# Altium PCB robot.pcbdoc (part 2 of 2)
Units mm, origin at the board's own origin, x right, y up, seen from the top; angles counter-clockwise.
Board outline 179.4 x 108.65 mm, 2 copper layers (Top Layer, Bottom Layer); 255 components, 246 nets, 775 pads, 189 vias.
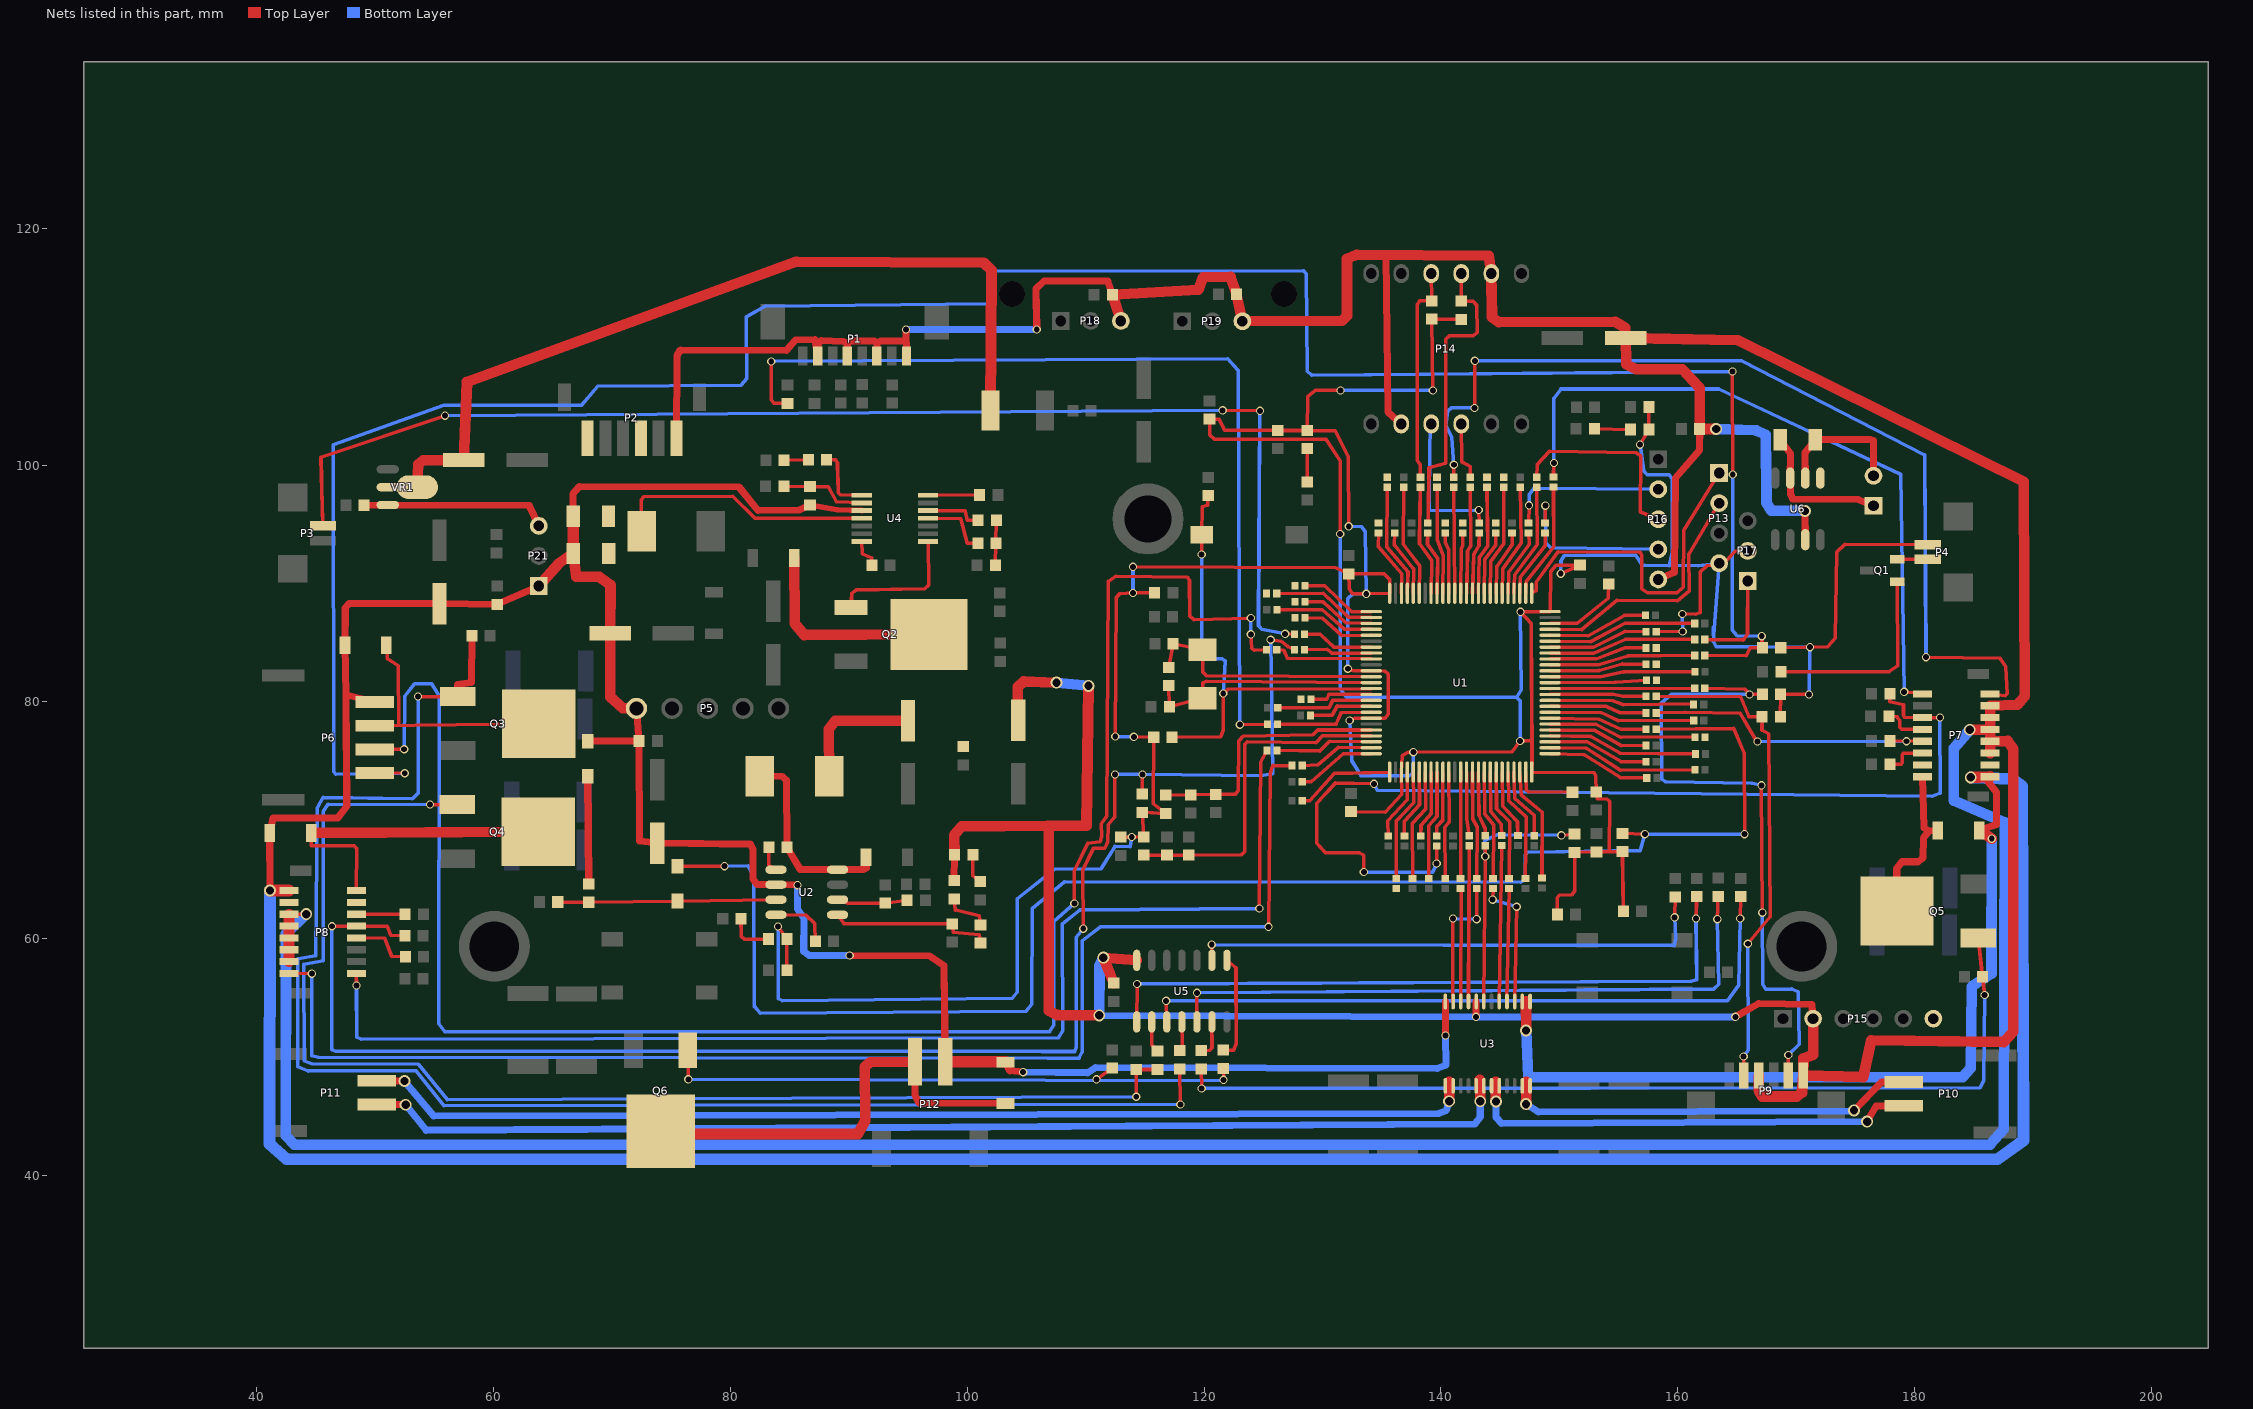
[diagram p2: the nets of this part, all layers, seen from the top]

## Via types
v1: diameter 0.7, hole 0.5, Top Layer to Bottom Layer, tented both sides, 157 vias
v2: diameter 1, hole 0.7, Top Layer to Bottom Layer, tented both sides, 29 vias
v3: diameter 0.62, hole 0.31, Top Layer to Bottom Layer, tented both sides, 2 vias
v4: diameter 0.7, hole 0.4, Top Layer to Bottom Layer, tented both sides, 1 vias

## Nets (pads, with @x,y where several pads share a name; then routed paths per layer and width w, separated by ;. In a path a pad name is that pad's centre, name@x,y a point inside that pad or via, vN(x,y) a via of type N, cw(c..) or ccw(c..) an arc to the next point about the centre after c; other vN are vias at no path point) (continued)
LIR-GND-B: P8.10 R48.2 | length 5.2
  Top Layer w0.3: P8.10@48.419,60.063 50.8,60.025 51.4,58.5 R48.2@52.555,58.475
LM-ENCA1-W: P8.16 R58.2 | length 104.9
  Top Layer w0.3: P8.16@48.419,57.063 v1(48.425,56.05) ; v1(124.675,62.55) 124.775,74.9 R58.2@125.325,75.9
  Bottom Layer w0.3: v1(48.425,56.05) 48.45,51.675 48.825,51.525 107.725,51.65 108.075,52.25 108.025,61.25 109.525,62.425 v1(124.675,62.55)
LM-ENCA2-W: P8.15 R57.2 | length 115.1
  Top Layer w0.3: P8.15@42.719,57.063 v1(44.65,57.05) ; v1(125.45,61) 125.6,73.975 ; 125.593,73.983 125.592,73.98 125.6,73.975 ; R57.2@127.442,74.623 125.79,74.625 125.6,73.975
  Bottom Layer w0.3: v1(44.65,57.05) 44.65,50.1 45.2,50 106.875,49.9 ; 106.825,49.9 109.45,49.925 109.7,50.425 109.725,59.825 111.25,61 v1(125.45,61)
LMDRV-GND-Y: P11.1 U3.1 U3.2 | length 94.2
  Top Layer w0.6: P11.1@50.149,47.998 v2(52.475,47.975)
  Top Layer w0.9: v2@140.7,46.275 140.725,47.925
  Bottom Layer w0.6: v2(52.475,47.975) 54.95,45.025 139.85,45.25 140.45,45.475 v2@140.7,46.275
  other v2: 140.7,46.275
LMDRV-VCC12V-R: P11.2 U3.5 U3.6 | length 97.6
  Top Layer w0.6: P11.2@50.149,45.998 v2(52.575,45.975)
  Top Layer w0.9: 143.3,48.075 v2@143.325,46.275
  Bottom Layer w0.6: v2(52.575,45.975) 54.3,43.825 142.875,44.35 143.325,44.925 v2@143.325,46.275
  other v2: 143.325,46.275
LS-DS-BL: P8.8 R46.1 R76.2 R77.1 | length 133.5
  Top Layer w0.3: v1(46.35,61.05) P8.8@48.419,61.064 51.025,61.05 51.325,60.275 R46.1@52.505,60.25 ; v1(109.8,60.85) 109.75,65.775 110.65,67.625 111.634,67.656 111.875,68.175 111.9,69.6 112.45,70.275 v1(112.475,73.875) ; R77.1@114.792,72.215 v1(114.8,73.875) ; v1(125.625,85.25) 126.5,85.125 127.075,84.675 R76.2@127.642,84.398
  Bottom Layer w0.3: v1(46.35,61.05) 46.35,50.625 46.675,50.5 106.3,50.475 109.075,50.475 109.2,50.825 109.2,60.1 v1(109.8,60.85) ; v1(112.475,73.875) v1(114.8,73.875) 124.775,73.75 125.8,73.95 v1(125.625,85.25)
LS-GND-Y: P8.6 R44.1 | length 4.1
  Top Layer w0.3: P8.6@48.419,62.065 R44.1@52.53,62.05
LS-VCC5V-R: C1.1 C2.1 C36.2 C37.2 C38.2 C39.1 C40.2 C41.2 D3.A L1.2 P1.1 P1.3 P1.5 P1.7 P2.1 P7.5 P7.7 P7.9 P7.11 P7.13 P8.5 P8.7 P8.9 P8.11 P8.13 P9.3 P9.6 P14.2 P14.8 P15.2 P16.5 P18.3 P19.3 R81.2 U3.20 U5.14 U6.3 | length 647.4
  Top Layer w0.3: P8.5@42.719,62.065 43.75,62.075 v2(44.175,62.075)
  Top Layer w0.6: P2.1@75.44,102.281 75.475,109.2 75.775,109.725 84.725,109.675 85.5,110.575 87.15,110.6 P1.7@87.375,109.207 87.375,110.2 87.675,110.525 89.55,110.45 89.875,110.25 ; P1.5@89.875,109.207 89.875,110.25 ; P1.3@92.374,109.207 92.375,110.325 ; v1(94.825,111.45) P1.1@94.873,109.207 94.875,110.325 94.65,110.475 92.675,110.475 92.375,110.325 ; R81.2@98.9,64.895 D3.A@98.93,67.1 ; v1(105.875,111.45) 105.825,114.9 106.475,115.55 111.875,115.525 C37.2@112.26,114.371 ; 135.373,117.755 135.55,104.475 P14.2@136.652,103.473 ; v1(142.975,53.4) U3.20@142.984,54.697 ; P16.5@158.367,90.338 159.725,90.95 159.804,98.883 161.852,101.281 C41.2@161.862,103.048 ; v1(164.875,53.4) 166.85,54.525 171.325,54.45 P15.2@171.437,53.248 ; v2(170.75,96.125) U6.3@170.777,93.698 ; 89.875,110.25 90.15,110.475 92.164,110.475 92.375,110.325
  Top Layer w0.9: P8.13@42.719,58.064 P8.5@42.719,62.065 ; L1.2@88.336,73.732 88.3,77.675 88.85,78.4 C1.1@94.998,78.42 ; D3.A@98.93,67.1 98.9,68.75 99.525,69.475 106.795,69.527 110.075,69.55 v2(110.25,81.35) ; C2.1@104.314,78.442 104.275,81.25 104.775,81.725 v2(107.55,81.625) ; 106.884,69.527 106.901,53.911 107.6,53.55 v2(111.15,53.525) ; C36.2@112.375,56.245 v2(111.5,58.4) U5.14@114.315,58.175 ; P18.3@112.982,112.173 C37.2@112.26,114.371 119.525,114.8 119.925,115.875 122.25,115.9 C38.2@122.745,114.425 ; C38.2@122.745,114.425 P19.3@123.242,112.148 131.625,112.175 132.075,112.6 132.075,117.425 132.95,117.775 144.046,117.683 P14.8@144.272,116.173 144.325,112.5 144.9,112.05 154.737,112.1 155.55,111.6 C39.1@155.612,110.725 155.65,108.525 156.499,108.102 160.4,108.075 161.875,106.475 C41.2@161.862,103.048 v2(163.25,103.05) ; C39.1@155.6,110.725 165.088,110.55 189.237,98.6 189.312,80.5 ; P9.3@166.849,48.447 166.85,47.175 167.15,46.675 170.05,46.675 170.5,47 P9.6@170.598,48.447 ; P15.2@171.437,53.248 171.45,50.2 170.625,49.9 P9.6@170.598,48.447 ; v2(184.675,77.65) P7.9@186.392,77.673 ; P7.5@186.392,75.671 P7.9@186.392,77.673 ; P7.7@186.392,76.672 187.875,76.7 188.35,76 188.35,52.175 187.55,51.275 176.35,51.425 175.675,48.325 P9.6@170.598,48.447 ; 189.325,80.5 188.675,79.75 P7.13@186.392,79.672 P7.11@186.392,78.674 P7.9@186.392,77.673
  Bottom Layer w0.6: v1(94.825,111.45) v1(105.875,111.45) ; v2(111.15,53.525) v1(142.975,53.4) v1(164.875,53.4)
  Bottom Layer w0.9: 43.175,42.6 42.45,43.35 42.475,60.425 v2(44.175,62.075) ; 43.2,42.6 186.4,42.625 ; v2(107.55,81.625) v2(110.25,81.35) ; v2(111.15,53.525) 111.175,57.725 v2(111.5,58.4) ; v2(163.25,103.05) 166.625,102.925 167.45,102.55 167.5,96.8 167.9,96.15 v2(170.75,96.125) ; v2(184.675,77.65) 183.325,76.075 183.325,71.675 187.625,69.825 187.55,43.925 186.375,42.625
LSWM-GND-BL: D17.1 P8.2 Q4.3 | length 27.7
  Top Layer w0.3: D17.1@44.6,68.925 44.62,67.85 48.225,67.85 48.428,67.624 P8.2@48.419,64.064
  Top Layer w0.9: D17.1@44.6,68.925 Q4.3@63.79,69.037
MSM-GND-W: D19.1 P12.1 Q6.3 | length 37.7
  Top Layer w0.6: P12.1@95.604,49.605 95.6,46.75 95.95,46.125 D19.1@103.225,46.075
  Top Layer w0.9: Q6.3@74.114,43.502 90.756,43.5 91.401,44.625 91.345,49.158 91.812,49.571 P12.1@95.604,49.605
MSTBY3V: R29.2 R30.1 U3.19 | length 22.2
  Top Layer w0.3: U3.19@143.634,54.697 v1(143.75,66.95) R29.2@143.754,67.848 ; v1(150.175,68.725) R30.1@151.292,68.823
  Bottom Layer w0.3: v1(143.75,66.95) 143.725,68.325 144.775,68.775 v1(150.175,68.725)
OSC8MIN: C10.2 R107.2 U1.12 Y1.2 | length 20.8
  Top Layer w0.3: R107.2@117.037,82.913 117.395,84.925 Y1.2@119.872,84.417 119.9,82.525 120.2,82.225 U1.12@134.125,82.125
OSC8MOUT: C11.2 R107.1 U1.13 Y1.1 | length 20.2
  Top Layer w0.3: R107.1@117.037,81.373 C11.2@117.07,79.6 Y1.1@119.872,80.317 119.9,81.625 120.225,81.725 U1.13@134.125,81.625
OUTAIN1: R24.2 U3.22 | length 9.6
  Top Layer w0.3: U3.22@141.684,54.697 R24.2@141.707,64.251
OUTAIN2: R26.2 U3.21 | length 13.2
  Top Layer w0.3: U3.21@142.334,54.697 R26.2@142.389,67.848
OUTBIN1: R33.2 U3.17 | length 13.2
  Top Layer w0.3: U3.17@144.934,54.697 R33.2@145.136,67.873
OUTBIN2: R35.2 U3.16 | length 9.6
  Top Layer w0.3: U3.16@145.584,54.697 R35.2@145.761,64.248
P2_3: P2.3
P2_6: P2.6
P7_3: P7.3
P7_4: P7.4
P8_3: P8.3
P8_4: P8.4
P20_1: P20.1 R158.1 U6.7 | length 12.3
  Top Layer w0.6: R158.1@168.652,102.148 169.525,100.975 U6.7@169.507,98.898 169.529,97.545 169.718,97.125 175.275,97.075 P20.1@176.542,96.558
P20_2: P20.2 R158.2 U6.6 | length 11.4
  Top Layer w0.6: U6.6@170.777,98.898 170.75,101.05 R158.2@171.632,102.148 176.243,102.15 176.524,102.049 P20.2@176.542,99.098
Q1_1: Q1.1 R71.2 | length 17.1
  Top Layer w0.3: R71.2@168.72,82.55 177.85,82.55 178.575,83.05 Q1.1@178.542,90.148
Q2_2: D11.1 Q2.2 | length 17.3
  Top Layer w0.9: D11.1@85.392,92.148 85.45,86.625 86.25,85.65 Q2.2@96.772,85.699
Q3_1: Q3.1 R135.2 R138.2 | length 129
  Top Layer w0.3: v1(53.625,80.45) Q3.1@56.967,80.448 ; R135.2@117.95,49.005 v1(118,46)
  Top Layer w0.6: Q3.1@56.967,80.448 56.95,81.475 58.125,81.65 R138.2@58.172,85.573
  Bottom Layer w0.3: 45.125,71.075 45.6,71.925 53.15,71.825 53.65,72.3 v1(53.625,80.45) ; 45.125,71.075 44.975,58.575 43.475,58.3 43.475,49.175 44.35,48.825 53.45,48.85 55.8,45.875 v1(118,46)
R10_2: R10.2
R12_2: R12.2
R14_2: R14.2
R16_2: R16.2
R18_2: R18.2
R21_2: R21.2
R22_2: R22.2
R23_2: R23.2
R42_2: R42.2
R50_2: R50.2
R59_2: R59.2
R62_2: R62.2 R63.1 | length 76.9
  Top Layer w0.3: v1(83.45,108.75) 83.45,105.525 83.675,105.225 R63.1@84.82,105.219 ; v1(123.025,78.075) R62.2@125.35,78.1
  Bottom Layer w0.3: v1(83.45,108.75) 122,108.975 122.875,108 v1(123.025,78.075)
R66_2: R66.2
R69_2: R69.2
R82_2: R82.2
R83_2: R83.2
R84_2: R84.2
R87_2: R81.1 R87.2 | length 3.8
  Top Layer w0.3: R81.1@98.9,63.355 98.975,62.425 101.025,61.925 R87.2@101.125,61.17
R88_2: D2.2 R88.2 | length 9.1
  Top Layer w0.6: D2.2@67.95,73.725 R88.2@68.042,64.618
R89_2: R89.2
R91_2: R91.2
R94_2: D3.K R94.2 | length 2.6
  Top Layer w0.3: D3.K@100.47,67.1 100.45,65.325 R94.2@101.1,64.82
R106_2: D5.K R106.2 | length 3.1
  Top Layer w0.3: R106.2@152.962,103.073 D5.K@156.03,103
R113_2: D8.K R113.2 | length 3.9
  Top Layer w0.3: R113.2@80.895,61.675 80.922,60.173 81.18,59.975 D8.K@83.224,59.97
R116_1: D14.A D15.A R116.1 | length 3.8
  Top Layer w0.3: R116.1@102.387,91.523 D15.A@102.467,95.348
R122_2: D13.K R122.2 | length 2.8
  Top Layer w0.3: R122.2@128.717,98.573 D13.K@128.725,101.38
R127_1: C25.2 R127.1 | length 2
  Top Layer w0.3: C25.2@84.545,100.4 R127.1@86.58,100.45
R139_2: Q4.1 R137.2 R139.2 | length 109.9
  Top Layer w0.3: v1(54.625,71.325) Q4.1@56.942,71.323 ; v1(114.275,46.65) R139.2@114.275,48.955 R137.2@116.075,48.955
  Bottom Layer w0.3: v1(54.625,71.325) 46.025,71.35 45.6,70.725 45.625,58.125 43.975,57.825 44.025,49.675 44.65,49.425 53.65,49.4 56.1,46.4 v1(114.275,46.65)
R152_2: Q5.1 R149.2 R152.2 | length 80.1
  Top Layer w0.3: R149.2@119.775,49.005 v1(119.8,47.35) ; Q5.1@185.375,60.05 R152.2@185.745,56.775 v1(185.925,55.25)
  Bottom Layer w0.3: v1(119.8,47.35) 185.525,47.4 185.85,48.025 v1(185.925,55.25)
R153_2: Q6.1 R151.2 R153.2 | length 50.1
  Top Layer w0.3: Q6.1@76.4,50.35 v1(76.45,48.125) ; v1(110.925,48.125) R153.2@112.25,49.08 ; R151.2@121.625,49.055 v1(121.65,48.075)
  Bottom Layer w0.3: v1(76.45,48.125) v1@121.65,48 ; v1@110.88,48.098 v1(110.925,48.125)
RBEER-GND-BL: P4.1 Q1.2 | length 2.6
  Top Layer w0.3: Q1.2@178.542,92.048 P4.1@181.121,92.026
REST: C12.2 R108.1 S1.1 U1.14 | length 39.2
  Top Layer w0.3: R108.1@117.295,77.025 121.425,77.05 121.624,77.588 v1(121.625,80.7) 122,81.05 U1.14@134.125,81.125 ; v1(119.8,92.45) S1.1@119.817,94.123 119.85,96.475 120.325,96.625 C12.2@120.342,97.428
  Bottom Layer w0.3: v1(119.8,92.45) 119.825,85.65 119.825,83.875 120.25,83.625 121.55,83.625 121.8,83.45 v1(121.625,80.7)
RIR-DS-BL: P7.12 R31.2 R43.2 | length 83.4
  Top Layer w0.3: v1(133.5,65.625) 133.5,67.025 133.1,67.275 130.25,67.275 129.525,68.05 129.525,71.45 131.1,73.15 v1(134.35,73.075) ; v1(139.65,66.35) R31.2@139.658,67.823 ; R43.2@177.95,80.7 177.93,80.025 179.075,79.775 179.075,78.9 179.15,78.7 P7.12@180.692,78.674 v1(182.15,78.675)
  Bottom Layer w0.3: v1(133.5,65.625) 139.325,65.6 v1(139.65,66.35) ; v1(134.35,73.075) 134.65,72.525 181.5,72.025 182.175,72.3 v1(182.15,78.675)
RIR-GND-B: P7.10 R2.1 | length 3.7
  Top Layer w0.3: R2.1@177.845,78.775 178.525,78.75 178.75,78.425 178.75,77.875 178.925,77.675 P7.10@180.692,77.673
RM-ENCB1-W: P7.16 R34.2 | length 57.9
  Top Layer w0.3: R34.2@149.517,98.998 v1(149.55,100.175) ; v1(179.125,80.85) P7.16@180.692,80.673
  Bottom Layer w0.3: v1(149.55,100.175) 149.55,105.625 150.15,106.425 163.475,106.425 178.825,99.225 v1(179.125,80.85)
RM-ENCB2-W: P7.15 R25.2 | length 80
  Top Layer w0.3: R25.2@141.087,98.973 v1(141.1,100.025) ; v1(142.85,104.825) v1(142.875,108.8) ; v1(180.975,83.775) 187.225,83.675 187.725,82.95 187.85,80.7 187.65,80.525 P7.15@186.392,80.673
  Bottom Layer w0.3: v1(141.1,100.025) 140.925,102.35 140.425,103.328 140.6,104.575 140.925,104.85 v1(142.85,104.825) ; v1(142.875,108.8) 165.425,108.8 180.85,100.85 v1(180.975,83.775)
RMDRV-GND-Y: P10.1 U3.7 U3.8 | length 38.4
  Top Layer w0.6: v2(176,44.55) 176.75,45.85 P10.1@179.08,45.888
  Top Layer w0.9: 144.625,47.9 v2(144.65,46.25)
  Bottom Layer w0.6: v2(144.65,46.25) 144.675,44.9 145.137,44.388 v2(176,44.55)
RMDRV-VCC12V-R: P10.2 U3.11 U3.12 | length 35
  Top Layer w0.6: v2(174.9,45.5) 177.225,47.875 P10.2@179.08,47.888
  Top Layer w0.9: v2(147.2,46.025) 147.225,47.9
  Bottom Layer w0.6: v2(147.2,46.025) 148.25,45.375 v2@175,45.45
RS1-S1-W: P9.5 R103.2 R104.1 | length 55.6
  Top Layer w0.3: R103.2@162.292,81.148 165.7,81.075 v1(166.075,80.625) 165.925,80.625 R104.1@167.155,80.65 ; v1(167.075,72.95) v1(167.15,62.2) ; P9.5@169.348,48.447 v1(169.35,50.175)
  Bottom Layer w0.3: v1(166.075,80.625) 159.475,80.625 158.625,79.9 158.675,73.45 158.97,73.268 166.278,73.134 v1(167.075,72.95) ; v1(167.15,62.2) 167.175,56.175 167.45,55.725 169.65,55.75 170.2,55.5 170.275,51.075 v1(169.35,50.175)
RS2-S2-Y: P9.2 R100.2 R101.1 | length 41.5
  Top Layer w0.3: R100.2@158.192,80.473 165.3,80.45 166.025,78.75 R101.1@167.13,78.75 167.125,77.625 167.7,77.275 167.825,61.875 v1(165.925,59.575) ; v1(165.575,50.05) P9.2@165.599,48.447
  Bottom Layer w0.3: v1(165.575,50.05) 165.975,50.6 v1(165.925,59.575)
RS-DS-BL: P7.8 R49.2 R98.2 | length 25.3
  Top Layer w0.3: R98.2@158.192,79.068 160.6,79.125 165.275,79.05 166.675,76.65 v1(166.75,76.65) ; R49.2@177.92,76.7 P7.8@180.692,76.672
  Bottom Layer w0.3: v1(166.75,76.65) v1(179.325,76.675)
RS-GND-Y: P7.6 R52.2 | length 3.6
  Top Layer w0.3: R52.2@177.92,74.725 178.875,74.725 178.95,74.875 178.95,75.55 179.1,75.675 P7.6@180.692,75.671
RSWM-GND-BL: D18.1 P7.2 Q5.3 | length 14.9
  Top Layer w0.6: Q5.3@178.527,62.336 178.5,65.925 178.95,66.5 180.3,66.5 180.725,66.8 180.75,68.5 181.25,69.1 ; P7.2@180.692,73.672 180.8,69.35 181.25,69.1 ; 181.25,69.1 D18.1@181.967,69.148 181.25,69.1
RX2: P14.3 R85.2 | length 12.6
  Top Layer w0.3: v1(143.2,96.2) R85.2@143.233,95.114
  Bottom Layer w0.3: P14.3@139.192,103.473 139.075,101.925 139.011,96.151 v1(143.2,96.2)
S1-R: P3.1 R75.2 | length 107
  Top Layer w0.3: P3.1@45.596,94.872 45.55,96.3 45.425,100.675 v1(55.9,104.175) ; v1(121.575,104.625) v1(124.725,104.575) ; v1(126.85,85.75) R75.2@127.642,85.723
  Bottom Layer w0.3: v1(55.9,104.175) v1(121.575,104.625) ; v1(124.725,104.575) 124.6,86.45 124.875,86.15 v1(126.85,85.75)
SCL: P14.9 R19.2 R146.1 | length 25.6
  Top Layer w0.3: R19.2@138.892,95.114 138.95,95.8 139,99.775 140.425,100.15 140.425,110.625 140.725,110.9 142.75,110.925 143.075,111.2 143.05,113.475 142.725,113.825 R146.1@141.725,113.845 P14.9@141.732,116.173
SDA: P14.10 R17.2 R147.1 | length 18.4
  Top Layer w0.3: R17.2@138.277,98.973 138.25,100.075 138,100.425 138.024,108.376 138.025,113.575 138.202,113.875 R147.1@139.225,113.87 P14.10@139.192,116.173
SPI-MISO: P16.3 R73.2 | length 16.8
  Top Layer w0.3: R73.2@148.112,98.973 148.125,100.025 149.175,101.15 156.475,101.05 156.875,100.75 156.825,96.05 P16.3@158.367,95.418
SPI-MOSI: P16.2 R74.2 | length 13.6
  Top Layer w0.3: R74.2@147.408,95.114 v1(147.45,96.6)
  Bottom Layer w0.3: v1(147.45,96.6) 147.475,97.55 147.875,98.05 P16.2@158.367,97.958
SPI-SCK: P16.4 R72.2 | length 14.3
  Top Layer w0.3: R72.2@148.8,95.114 v1(148.825,96.575)
  Bottom Layer w0.3: v1(148.825,96.575) 148.85,93.45 149.28,93.001 P16.4@158.367,92.878
STATE: P15.6
SWCLK: P13.1 U1.76 | length 28.6
  Top Layer w0.3: U1.76@147.675,89.175 148.05,89.4 148.047,90.075 149.9,92.675 156.8,92.65 156.975,92.35 156.975,89.55 157.5,89.2 159.907,89.206 160.478,89.682 160.507,94.449 P13.1@163.5,99.325
SWDIO: P13.2 U1.72 | length 21.1
  Top Layer w0.3: U1.72@149.225,86.125 151.9,86.1 154.9,88.6 159.95,88.525 160.975,89.35 160.95,92.5 P13.2@163.5,96.785
TIM1CH1DMPWA: R27.2 U3.23 | length 11.6
  Top Layer w0.3: U3.23@141.025,54.725 v1(141.025,61.7) ; v1(143.025,61.65) R27.2@143.041,64.248
  Bottom Layer w0.3: v1(141.025,61.7) v1(143.025,61.65)
TIM1CH2DMPWB: R32.2 U3.15 | length 11
  Top Layer w0.3: v1(144.375,63.3) R32.2@144.411,64.223 ; U3.15@146.234,54.697 v1(146.4,62.7)
  Bottom Layer w0.3: v1(144.375,63.3) v1(146.4,62.7)
TX2: P14.4 R86.2 | length 4.9
  Top Layer w0.3: P14.4@141.732,103.473 141.75,100.275 142.5,99.875 R86.2@142.492,98.973
U1_1: R14.1 U1.1 | length 6.5
  Top Layer w0.3: R14.1@128.517,89.798 130.2,89.8 132.475,87.6 U1.1@134.125,87.625
U1_2: R16.1 U1.2 | length 8.8
  Top Layer w0.3: R16.1@126.142,89.148 130.075,89.175 132.2,87.15 U1.2@134.125,87.125
U1_3: R18.1 U1.3 | length 6.3
  Top Layer w0.3: R18.1@128.517,88.448 130.05,88.45 131.975,86.675 U1.3@134.125,86.625
U1_4: R20.1 U1.4 | length 8.6
  Top Layer w0.3: R20.1@126.15,87.775 130,87.775 131.825,86.15 U1.4@134.125,86.125
U1_5: R22.1 U1.5 | length 6.2
  Top Layer w0.3: R22.1@128.517,87.098 130,87.075 131.65,85.6 U1.5@134.125,85.625
U1_7: R75.1 U1.7 | length 6.1
  Top Layer w0.3: R75.1@128.492,85.723 129.825,85.7 131,84.6 U1.7@134.125,84.625
U1_8: R76.1 U1.8 | length 5.8
  Top Layer w0.3: R76.1@128.492,84.398 130.425,84.45 130.8,84.125 U1.8@134.125,84.125
U1_9: R78.1 U1.9 | length 8.4
  Top Layer w0.3: R78.1@126.139,84.399 126.725,84.375 127.05,83.675 U1.9@134.125,83.625
U1_15: R59.1 U1.15 | length 5.3
  Top Layer w0.3: R59.1@129.033,80.227 130.35,80.225 130.55,80.625 U1.15@134.125,80.625
U1_16: R60.1 U1.16 | length 8.3
  Top Layer w0.3: R60.1@126.225,79.5 130.575,79.5 130.875,80.15 U1.16@134.125,80.125
U1_17: R61.1 U1.17 | length 5.6
  Top Layer w0.3: R61.1@129.008,78.852 130.825,78.875 131.25,79.65 U1.17@134.125,79.625
U1_18: R62.1 U1.18 | length 8.6
  Top Layer w0.3: R62.1@126.2,78.1 131.15,78.1 131.6,79.1 U1.18@134.125,79.125
U1_23: R58.1 U1.23 | length 8.3
  Top Layer w0.3: R58.1@126.175,75.9 129.775,75.85 130.6,76.675 U1.23@134.125,76.625
U1_24: R57.1 U1.24 | length 6.4
  Top Layer w0.3: R57.1@128.292,74.623 129.625,74.675 131.35,76.15 U1.24@134.125,76.125
U1_25: R56.1 U1.25 | length 6.7
  Top Layer w0.3: R56.1@128.292,73.248 129.05,73.25 131.75,75.625 U1.25@134.125,75.625
U1_26: R55.1 U1.26 | length 8.4
  Top Layer w0.3: R55.1@128.292,71.648 128.931,71.662 131,73.95 U1.26@135.675,74.075
U1_29: R8.1 U1.29 | length 6.1
  Top Layer w0.3: R8.1@135.561,68.673 135.525,69.975 137.175,71.725 U1.29@137.175,74.075
U1_30: R50.1 U1.30 | length 9.6
  Top Layer w0.3: R50.1@136.236,65.098 136.25,69.975 137.7,71.475 U1.30@137.675,74.075
U1_31: R47.1 U1.31 | length 5.9
  Top Layer w0.3: R47.1@136.927,68.673 136.925,69.9 138.2,71.325 U1.31@138.175,74.075
U1_32: R45.1 U1.32 | length 9.4
  Top Layer w0.3: R45.1@137.614,65.098 137.6,69.75 138.725,70.95 U1.32@138.675,74.075
U1_33: R64.1 U1.33 | length 5.7
  Top Layer w0.3: R64.1@138.292,68.673 138.325,69.575 139.2,70.6 U1.33@139.175,74.075
U1_34: R65.1 U1.34 | length 9.3
  Top Layer w0.3: R65.1@138.967,65.073 138.975,69.525 139.675,70.35 U1.34@139.675,74.075
U1_35: R31.1 U1.35 | length 5.6
  Top Layer w0.3: R31.1@139.658,68.673 139.65,69.475 140.175,70.025 U1.35@140.175,74.075
U1_36: R28.1 U1.36 | length 9.1
  Top Layer w0.3: R28.1@140.37,65.098 140.325,69.4 140.7,69.825 U1.36@140.675,74.075
U1_38: R24.1 U1.38 | length 9
  Top Layer w0.3: R24.1@141.692,65.198 U1.38@141.7,74.2
U1_39: R26.1 U1.39 | length 5.4
  Top Layer w0.3: U1.39@142.175,74.075 142.2,70.125 R26.1@142.389,68.698
U1_40: R27.1 U1.40 | length 9.1
  Top Layer w0.3: U1.40@142.675,74.075 142.7,70.1 143.075,69.45 R27.1@143.041,65.098
U1_41: R29.1 U1.41 | length 5.5
  Top Layer w0.3: U1.41@143.175,74.075 143.225,70.425 143.75,69.275 R29.1@143.754,68.698
U1_42: R32.1 U1.42 | length 9.3
  Top Layer w0.3: U1.42@143.675,74.075 143.725,70.525 144.45,69.625 R32.1@144.411,65.073
U1_43: R33.1 U1.43 | length 5.7
  Top Layer w0.3: U1.43@144.175,74.075 144.225,70.725 145.1,69.675 R33.1@145.136,68.723
U1_44: R35.1 U1.44 | length 9.5
  Top Layer w0.3: U1.44@144.675,74.075 144.7,70.975 145.825,69.875 R35.1@145.761,65.098
U1_45: R36.1 U1.45 | length 5.8
  Top Layer w0.3: U1.45@145.175,74.075 145.225,71.2 146.475,69.875 R36.1@146.514,68.723
U1_46: R37.1 U1.46 | length 9.7
  Top Layer w0.3: U1.46@145.675,74.075 145.725,71.65 147.225,70.275 R37.1@147.142,65.073
U1_47: R11.1 U1.47 | length 6.1
  Top Layer w0.3: U1.47@146.175,74.075 146.25,71.85 147.875,70.425 R11.1@147.892,68.698
U1_48: R9.1 U1.48 | length 9.8
  Top Layer w0.3: U1.48@146.675,74.075 146.775,72.125 148.55,70.675 R9.1@148.542,65.123
U1_51: R7.1 U1.51 | length 8.7
  Top Layer w0.3: U1.51@149.225,75.625 152.075,75.55 155.175,73.6 R7.1@157.392,73.578
U1_52: R6.1 U1.52 | length 12.8
  Top Layer w0.3: U1.52@149.225,76.125 152.261,76.1 155.175,74.225 R6.1@161.467,74.273
U1_53: R5.1 U1.53 | length 8.6
  Top Layer w0.3: U1.53@149.225,76.625 152.376,76.624 155.2,74.95 R5.1@157.342,74.95
U1_54: R3.1 U1.54 | length 12.6
  Top Layer w0.3: U1.54@149.225,77.125 152.675,77.075 155.125,75.675 R3.1@161.492,75.598
U1_55: R90.1 U1.55 | length 8.5
  Top Layer w0.3: U1.55@149.225,77.625 152.975,77.6 155.25,76.3 R90.1@157.342,76.323
U1_56: R91.1 U1.56 | length 12.5
  Top Layer w0.3: U1.56@149.225,78.125 153.125,78.1 155.225,77 R91.1@161.45,77.05
U1_57: R92.1 U1.57 | length 8.3
  Top Layer w0.3: U1.57@149.225,78.625 153.325,78.55 155.25,77.675 R92.1@157.342,77.695
U1_58: R97.1 U1.58 | length 12.3
  Top Layer w0.3: U1.58@149.225,79.125 153.55,79.1 155,78.4 R97.1@161.357,78.435
U1_59: R98.1 U1.59 | length 8.2
  Top Layer w0.3: U1.59@149.225,79.625 153.95,79.625 155.125,79.075 R98.1@157.342,79.068
U1_60: R99.1 U1.60 | length 12.2
  Top Layer w0.3: U1.60@149.225,80.125 154.525,80.1 155.425,79.75 R99.1@161.357,79.827
U1_61: R100.1 U1.61 | length 8.1
  Top Layer w0.3: U1.61@149.225,80.625 154.55,80.625 155.375,80.475 R100.1@157.342,80.473
U1_62: R103.1 U1.62 | length 12.2
  Top Layer w0.3: U1.62@149.225,81.125 R103.1@161.442,81.148
U1_63: R66.1 U1.63 | length 8.1
  Top Layer w0.3: U1.63@149.225,81.625 154.75,81.675 R66.1@157.367,81.823
U1_64: R67.1 U1.64 | length 12.3
  Top Layer w0.3: U1.64@149.225,82.125 153.509,82.12 155.45,82.525 R67.1@161.442,82.546
U1_65: R69.1 U1.65 | length 8.2
  Top Layer w0.3: U1.65@149.225,82.625 153.375,82.65 155.325,83.2 R69.1@157.342,83.185
U1_66: R70.1 U1.66 | length 12.3
  Top Layer w0.3: U1.66@149.225,83.125 153.325,83.15 155.775,83.875 R70.1@161.442,83.92
U1_67: R42.1 U1.67 | length 8.3
  Top Layer w0.3: U1.67@149.225,83.625 153.125,83.625 155.55,84.575 R42.1@157.342,84.558
U1_68: R41.1 U1.68 | length 12.5
  Top Layer w0.3: U1.68@149.225,84.125 152.907,84.1 155.582,85.275 R41.1@161.442,85.27
U1_69: R40.1 U1.69 | length 8.4
  Top Layer w0.3: U1.69@149.225,84.625 152.85,84.6 155.55,85.95 R40.1@157.342,85.93
U1_70: R39.1 U1.70 | length 12.6
  Top Layer w0.3: U1.70@149.225,85.125 152.625,85.075 155.525,86.625 R39.1@161.442,86.62
U1_71: R38.1 U1.71 | length 8.5
  Top Layer w0.3: U1.71@149.225,85.625 152.425,85.575 155.5,87.3 R38.1@157.275,87.325
U1_77: R34.1 U1.77 | length 9.8
  Top Layer w0.3: U1.77@147.175,89.175 147.2,90.15 149.55,93.125 R34.1@149.517,98.148
U1_78: R72.1 U1.78 | length 5.8
  Top Layer w0.3: U1.78@146.675,89.175 146.7,90.5 148.825,93.225 R72.1@148.8,94.264
U1_79: R73.1 U1.79 | length 9.6
  Top Layer w0.3: U1.79@146.175,89.175 146.25,90.75 148.15,93.325 R73.1@148.112,98.123
U1_80: R74.1 U1.80 | length 5.7
  Top Layer w0.3: U1.80@145.675,89.175 145.725,90.925 147.475,93.325 R74.1@147.408,94.264
U1_81: R79.1 U1.81 | length 9.4
  Top Layer w0.3: U1.81@145.175,89.175 145.225,91.2 146.775,93.4 R79.1@146.707,98.123
U1_82: R80.1 U1.82 | length 5.5
  Top Layer w0.3: U1.82@144.675,89.175 144.724,91.441 146.025,93.275 R80.1@146.017,94.264
U1_83: R82.1 U1.83 | length 9.3
  Top Layer w0.3: U1.83@144.175,89.175 144.2,91.825 145.325,93.4 R82.1@145.302,98.123
U1_84: R83.1 U1.84 | length 5.4
  Top Layer w0.3: U1.84@143.675,89.175 143.7,92 144.65,93.275 R83.1@144.625,94.264
U1_85: R84.1 U1.85 | length 9.2
  Top Layer w0.3: U1.85@143.175,89.175 143.25,92.225 143.95,93.15 R84.1@143.897,98.123
U1_86: R85.1 U1.86 | length 5.2
  Top Layer w0.3: U1.86@142.675,89.175 142.775,92.45 143.225,93.2 R85.1@143.233,94.264
U1_87: R86.1 U1.87 | length 9
  Top Layer w0.3: U1.87@142.175,89.175 142.25,92.725 142.525,93.175 R86.1@142.492,98.123
U1_88: R89.1 U1.88 | length 5.1
  Top Layer w0.3: U1.88@141.675,89.175 141.725,92.875 141.85,93.225 R89.1@141.842,94.264
U1_89: R25.1 U1.89 | length 8.9
  Top Layer w0.3: R25.1@141.087,98.123 U1.89@141.175,89.175
U1_90: R23.1 U1.90 | length 5.2
  Top Layer w0.3: R23.1@140.367,94.264 140.375,93.45 140.65,92.875 U1.90@140.675,89.175
U1_91: R21.1 U1.91 | length 9
  Top Layer w0.3: R21.1@139.682,98.123 139.7,93.7 140.2,92.325 U1.91@140.175,89.175
U1_92: R19.1 U1.92 | length 5.4
  Top Layer w0.3: R19.1@138.892,94.264 138.875,93.3 139.725,92.125 U1.92@139.675,89.175
U1_93: R17.1 U1.93 | length 9.3
  Top Layer w0.3: R17.1@138.277,98.123 138.2,93.375 139.225,91.95 U1.93@139.175,89.175
U1_95: R15.1 U1.95 | length 9.4
  Top Layer w0.3: R15.1@136.872,98.123 136.825,93.3 138.225,91.45 U1.95@138.175,89.175
U1_96: R13.1 U1.96 | length 5.7
  Top Layer w0.3: R13.1@136.1,94.264 136.075,93.25 137.7,91.225 U1.96@137.675,89.175
U1_97: R10.1 U1.97 | length 9.6
  Top Layer w0.3: R10.1@135.467,98.123 135.45,93.05 137.225,90.975 U1.97@137.175,89.175
U1_98: R12.1 U1.98 | length 5.8
  Top Layer w0.3: R12.1@134.742,94.273 134.725,93.1 136.7,90.825 U1.98@136.675,89.175
U2_1: C3.1 U2.1 | length 2.2
  Top Layer w0.3: C3.1@83.249,67.72 83.225,66.225 U2.1@83.85,65.83
U2_3: D4.2 R88.1 R95.2 U2.3 | length 18.4
  Top Layer w0.3: R95.2@65.42,63.1 R88.1@68.042,63.078 D4.2@75.525,63.175 U2.3@83.85,63.29
U2_4: C9.2 U2.4 | length 5.1
  Top Layer w0.3: U2.4@83.85,62.02 86.354,61.991 87.129,61.278 C9.2@87.174,59.77
U2_5: R87.1 R93.2 U2.5 | length 13.7
  Top Layer w0.3: U2.5@89.05,62.02 89.575,61.275 R93.2@98.725,61.245 98.825,60.55 101.025,60.325 R87.1@101.125,59.63
U2_6: C7.2 C8.2 U2.6 | length 6
  Top Layer w0.3: U2.6@89.05,63.29 89.925,62.975 C8.2@93.075,63.005 ; C8.2@93.075,63.005 C7.2@94.93,63.25
U2_8: C3.2 D1.2 L1.1 U2.8 | length 16.7
  Top Layer w0.6: L1.1@82.489,73.732 84.375,73.7 84.725,73.4 C3.2@84.789,67.72 85.9,65.85 U2.8@89.05,65.83 91.25,65.85 91.475,65.975 D1.2@91.452,66.873
U4_1: Q2.1 U4.1 | length 11.6
  Top Layer w0.3: Q2.1@90.188,87.971 90.232,89.17 90.638,89.449 96.4,89.55 96.753,89.864 U4.1@96.698,93.554
U4_4: D14.K U4.4 | length 5.8
  Top Layer w0.3: U4.4@96.698,95.504 99.45,95.475 100,93.4 D14.K@100.897,93.398
U4_5: D15.K U4.5 | length 4.9
  Top Layer w0.3: U4.5@96.698,96.154 99.825,96.125 100,95.325 D15.K@100.927,95.348
U4_7: R126.2 U4.7 | length 4.4
  Top Layer w0.3: U4.7@96.698,97.454 R126.2@101.055,97.475
U4_8: R127.2 U4.8 | length 5.7
  Top Layer w0.3: R127.2@88.12,100.45 88.875,100.45 89.047,100.173 89.102,97.691 89.275,97.475 U4.8@91.098,97.454
U4_9: R125.2 R131.1 U4.9 | length 7.6
  Top Layer w0.3: R131.1@84.512,98.198 R125.2@86.725,98.17 ; R125.2@86.45,98.175 88.275,98.155 88.95,96.9 U4.9@91.098,96.804
U4_11: L2.2 R121.1 R123.1 U4.11 | length 22.2
  Top Layer w0.3: L2.2@72.505,94.416 72.475,97.05 72.678,97.323 80.209,97.366 82.05,95.525 83.775,95.525 U4.11@91.098,95.504
U4_14: C14.1 U4.14 | length 2.6
  Top Layer w0.3: U4.14@91.098,93.554 91.125,92.5 91.925,92.15 C14.1@91.947,91.523
U5_1: R136.2 U5.1 | length 57.5
  Top Layer w0.3: U5.1@114.315,52.975 v1(114.35,56.175) ; v1(161.55,61.7) R136.2@161.617,63.553
  Bottom Layer w0.3: v1(114.35,56.175) 161.125,56.4 161.625,56.55 v1(161.55,61.7)
U5_2: R137.1 U5.2 | length 2.7
  Top Layer w0.3: U5.2@115.585,52.975 115.575,51.025 R137.1@116.075,50.495
U5_3: R134.2 U5.3 | length 58.3
  Top Layer w0.3: v1(116.8,54.75) U5.3@116.855,52.975 ; v1(165.275,61.7) R134.2@165.317,63.553
  Bottom Layer w0.3: v1(116.8,54.75) 164.2,54.751 165.175,56.1 v1(165.275,61.7)
U5_4: R135.1 U5.4 | length 2.5
  Top Layer w0.3: R135.1@117.95,50.545 118.15,51.05 U5.4@118.125,52.975
U5_5: R148.2 U5.5 | length 54.1
  Top Layer w0.3: U5.5@119.395,52.975 v1(119.4,55.425) ; v1(163.35,61.65) R148.2@163.442,63.578
  Bottom Layer w0.3: v1(119.4,55.425) 163.05,55.75 163.475,56.15 v1(163.35,61.65)
U5_6: R149.1 U5.6 | length 3.2
  Top Layer w0.3: R149.1@119.775,50.545 120.475,50.575 120.675,50.8 U5.6@120.665,52.975
U5_8: R151.1 U5.8 | length 8.9
  Top Layer w0.3: R151.1@121.625,50.595 122.5,50.575 122.725,51.175 122.7,57.55 U5.8@121.935,58.175
U5_9: R150.2 U5.9 | length 44.5
  Top Layer w0.3: v1(120.65,59.5) U5.9@120.665,58.175 ; v1(159.75,61.8) R150.2@159.792,63.528
  Bottom Layer w0.3: v1(120.65,59.5) 159.725,59.425 159.825,60.025 v1(159.75,61.8)
U6_5: U6.5
UART1-RX: P17.2 R40.2 | length 13.4
  Top Layer w0.3: R40.2@158.192,85.93 v1(160.425,85.95) ; v1(160.4,87.425) 161.525,87.4 161.925,87.55 161.925,90.975 162.475,91.5 163.75,91.525 164.875,92.725 P17.2@165.917,92.748
  Bottom Layer w0.3: v1(160.4,87.425) v1(160.425,85.95)
UART1-TX: P17.1 R41.2 | length 8.3
  Top Layer w0.3: R41.2@162.292,85.27 165.55,85.225 165.898,85.743 P17.1@165.917,90.208
VCC3V3: C15.2 C16.2 C17.2 C18.2 C19.2 C20.2 C21.2 D5.A D6.A D7.A D8.A D13.A P4.2 P13.4 R30.2 R68.2 R77.2 R101.2 R102.1 R104.2 R108.2 R119.2 R129.2 R130.2 R132.2 R133.2 R143.1 R146.2 R147.2 U1.11 U1.19 U1.28 U1.50 U1.75 U1.100 | length 402.7
  Top Layer w0.3: v1(84.025,61.025) D8.A@84.764,59.97 R130.2@84.77,57.35 ; v1(112.5,77.075) 112.575,88.8 112.9,89.15 v1(114,89.2) R132.2@115.82,89.218 ; C20.2@112.975,68.57 v1(113.897,68.582) R133.2@114.9,68.595 R77.2@114.792,70.675 R119.2@116.756,70.575 115.725,71.4 R108.2@115.755,77.025 ; v1(114,91.4) 131.125,91.325 C15.2@132.217,90.803 ; v1(114.075,77.05) R108.2@115.755,77.025 ; v1(131.5,94.175) 131.5,100.375 130.3,102.175 120.875,102.2 120.475,102.55 R143.1@120.467,103.878 121.267,103.875 121.75,102.925 C21.2@126.242,102.918 D13.A@128.725,102.92 ; v1(131.525,106.3) 129.4,106.3 128.75,105.775 D13.A@128.725,102.92 ; v1(132.15,82.8) 132.625,82.625 134.125,82.625 135.275,82.6 135.575,82.35 135.575,79 135.275,78.6 U1.19@134.125,78.625 132.725,78.625 v1(132.3,78.425) ; v1(132.225,94.825) 132.175,100.7 131.1,102.875 D13.A@128.725,102.92 ; C16.2@132.417,70.728 135.3,70.675 136.7,72.2 U1.28@136.675,74.075 136.727,75.446 137.252,75.761 v1(137.675,75.75) 146.025,75.775 v1(146.7,76.7) 147.685,76.699 ; v1(139.325,106.3) R147.2@139.225,112.33 R146.2@141.725,112.305 ; D6.A@149.836,62.047 149.85,63.475 150,63.675 151.075,63.7 151.3,64 R30.2@151.292,67.283 C18.2@153.142,67.328 R102.1@155.342,67.353 R129.2@155.424,62.301 ; v1(150.125,90.825) C17.2@151.75,91.545 149.725,91.525 149.275,90.975 U1.75@149.225,87.625 148.05,87.6 v1(146.725,87.6) 147.65,86.6 147.7,75.3 U1.50@147.675,74.075 152.95,74 153.1,73.725 C19.2@153.117,72.393 153.2,71.825 154.05,71.775 154.275,71.575 154.228,67.34 ; v1(156.825,101.725) D5.A@157.57,103 D7.A@157.57,104.9 ; R101.2@168.67,78.75 R104.2@168.695,80.65 v1(171.1,80.625) ; R68.2@168.707,84.573 172.675,84.65 173.325,85.4 173.425,92.65 174.125,93.3 P4.2@181.121,93.276 ; C15.2@132.217,90.803 132.25,89.6 132.55,89.125 v1(133.7,89.125) U1.100@135.675,89.175 135.7,90.325 135.225,90.8 C15.2@132.217,90.803
  Bottom Layer w0.3: v1(84.025,61.025) 84.025,54.95 84.375,54.775 103.8,54.975 104.225,55.5 104.225,63.375 107.35,65.85 111.325,65.925 112.475,67.8 113.775,67.775 v1(113.897,68.582) ; v1(112.5,77.075) v1(114.075,77.05) ; v1(114,89.2) v1(114,91.4) ; v1(131.5,94.175) 131.5,81.125 132.05,80.375 146.4,80.375 ; v1(131.525,106.3) v1(139.325,106.3) ; v1(132.15,82.8) 132.125,88.725 132.55,89.1 v1(133.7,89.125) ; v1(132.225,94.825) 133.312,94.799 133.6,94.4 v1(133.7,89.125) ; v1(132.3,78.425) 132.475,75.025 133.25,73.775 137.3,73.75 137.65,73.975 v1(137.675,75.75) ; v1(146.7,76.7) 146.725,80.05 146.4,80.375 ; v1(146.725,87.6) 146.8,81.05 146.4,80.375 ; v1(150.125,90.825) 150.15,91.925 150.425,92.35 152.325,92.375 156.475,92.375 157.025,91.5 162.125,91.525 P13.4@163.5,91.705 ; v1(156.825,101.725) 157.125,99.525 157.425,99.175 159.3,99.175 159.55,98.775 159.55,92.6 159.301,91.511 ; 157.225,91.525 161.725,91.5 P13.4@163.5,91.705 ; 162.998,85.619 163.008,86.316 ; v1(171.1,80.625) v1(171.175,84.625) 163.25,84.675 163.025,85.1 P13.4@163.5,91.705
VCC3V3A: C29.2 C30.2 R133.1 U1.22 | length 28.7
  Top Layer w0.3: R133.1@114.9,67.055 C30.2@116.875,67.055 ; C30.2@116.875,67.055 C29.2@118.7,67.055 123.125,67.075 123.425,67.35 123.425,76.375 123.65,76.625 129.45,76.55 130,77.15 U1.22@134.125,77.125
VCC5VEN-L: D4.1 R92.2 R102.2 | length 131.8
  Top Layer w0.3: D4.1@75.525,66.125 v1(79.5,66.125) ; R102.2@155.342,68.893 v1(157.225,68.825) ; R92.2@158.192,77.695 164.725,77.75 165.609,75.693 v1(165.65,68.825)
  Bottom Layer w0.3: v1(79.5,66.125) 81.5,66.15 81.975,65.225 82.025,54.275 82.525,53.7 104.975,53.875 105.45,54.475 105.475,62.55 108.2,64.8 ; 108.25,64.825 146.752,64.775 147.125,64.975 147.125,66.748 147.125,67.1 147.35,67.3 156.825,67.45 v1(157.225,68.825) v1(165.65,68.825)
VCPA1: C26.2 U1.49 | length 5.5
  Top Layer w0.3: U1.49@147.175,74.075 147.225,72.55 147.425,72.4 C26.2@151.117,72.368
VCPA2: C31.2 U1.73 | length 6.9
  Top Layer w0.3: U1.73@149.225,86.625 151.5,86.625 154.15,88.75 C31.2@154.175,89.955
VM-FG-B: P6.4 R68.1 R70.2 | length 203.2
  Top Layer w0.3: P6.4@49.895,74.002 v1(52.5,73.975) ; R70.2@162.292,83.92 165.8,83.9 166.125,84.575 R68.1@167.167,84.573 v1(167.1,85.55) ; v1(164.625,107.9) v1(164.65,99.2)
  Bottom Layer w0.3: v1(52.5,73.975) 46.675,73.9 46.5,74.1 46.45,101.725 55.775,105.05 67.425,105.05 68.8,106.65 80.9,106.75 81.4,107.325 81.35,112.525 82.95,113.425 101.975,113.625 102.25,116.35 128.4,116.4 128.625,116.15 128.7,107.925 129.1,107.6 v1(164.625,107.9) ; v1(164.65,99.2) 164.6,86.1 165.025,85.575 v1(167.1,85.55)
VM-GND-BL: D16.1 P6.2 Q3.3 | length 21.2
  Top Layer w0.3: P6.2@49.895,78.002 Q3.3@63.815,78.162 ; D16.1@50.975,84.775 51.025,83.658 51.933,83.053 51.975,78.025
VM-PWM-Y: P6.3 R78.2 | length 150.2
  Top Layer w0.3: P6.3@49.895,76.002 v1(52.45,76) ; 109.025,65.675 110.175,68.05 111.25,68.2 111.35,68.65 111.325,69.725 111.8,70.375 111.925,90.175 112.575,90.625 118.6,90.525 118.775,90.25 118.8,87.25 119.15,86.95 v1(123.95,87.075) ; 109.025,65.675 v1(109.05,62.975) ; v1(123.95,85.7) 124.025,84.525 124.275,84.35 R78.2@125.289,84.399
  Bottom Layer w0.3: v1(52.45,76) 52.5,80.475 53.325,81.525 54.782,81.525 55.4,80.525 55.375,52.8 55.9,52.125 106.95,52.15 107.3,52.675 107.325,61.45 v1(109.05,62.975) ; v1(123.95,85.7) v1(123.95,87.075)
VM-VCC12V-R: C4.2 C5.1 C6.1 C24.1 D2.1 D16.2 D17.2 D18.2 D19.2 P5.1 P6.1 P7.1 P8.1 P12.2 P21.1 R121.2 R123.2 R124.2 R125.1 U2.2 U3.13 U3.14 U3.24 U4.10 | length 488
  Top Layer w0.3: R124.2@60.3,88.23 R124.2@60.354,87.998 ; U3.14@146.885,54.697 U3.13@147.534,54.697
  Top Layer w0.5: R125.1@86.725,96.63 89.025,96.225 U4.10@91.098,96.154
  Top Layer w0.6: v2(41.125,64.075) D17.2@41.1,68.925 41.382,70.189 46.85,70.2 47.6,71.2 47.525,80.6 ; P6.1@49.957,79.99 47.525,80.6 ; P21.1@63.817,89.783 R124.2@60.3,88.23 C5.1@55.427,88.305 47.775,88.3 47.475,87.925 D16.2@47.45,84.775 47.525,80.6 ; R123.2@66.726,95.672 66.7,97.55 67.25,98.175 80.725,98.15 82.325,96.175 85.8,96.2 R125.1@86.725,96.63 ; D2.1@67.95,76.675 C4.2@72.297,76.698 ; P5.1@72.067,79.448 C4.2@72.297,76.698 ; v1(85.675,64.525) U2.2@83.85,64.56 82.25,64.575 81.925,65.05 81.925,67.525 81.7,67.975 C6.1@73.819,68.078 72.325,68.237 C4.2@72.297,76.698 ; v1(90.075,58.575) 96.8,58.525 98.025,57.725 P12.2@98.144,49.605 ; D19.2@103.225,49.575 103.6,48.85 v1(104.725,48.725) ; U3.24@140.384,54.697 v1(140.4,51.825) ; D18.2@185.467,69.148 186.925,69.65 186.925,72.375 186.085,73.416 P7.1@186.392,73.672
  Top Layer w0.9: P21.1@63.817,89.783 65.575,91.75 R121.2@66.735,92.525 66.975,90.575 68.925,90.55 69.875,89.875 C24.1@69.846,85.794 69.85,80.425 70.9,79.475 P5.1@72.067,79.448 ; 147.189,54.697 v2(147.2,52.25) ; D18.2@185.467,69.148 v1(186.525,68.45)
  Top Layer w1: v2(41.125,64.075) P8.1@42.719,64.064 ; R123.2@66.726,95.672 R121.2@66.735,92.525 ; P12.2@98.144,49.605 D19.2@103.225,49.575 ; v2(184.75,73.625) P7.1@186.392,73.672
  Bottom Layer w0.6: v1(85.675,64.525) 85.675,62.5 86.225,61.7 86.2,58.933 86.65,58.575 v1(90.075,58.575) ; v1(104.725,48.725) 110.15,48.675 110.825,49.125 139.7,49.05 140.425,49.325 v1(140.4,51.825)
  Bottom Layer w0.9: v2(147.2,52.25) 147.375,48.3 184.075,48.3 184.75,49.05 184.825,55.95 186.5,57.05 v1(186.525,68.45)
  Bottom Layer w1: v2(41.125,64.075) 41.075,42.675 42.525,41.4 187.025,41.375 189.2,42.95 189.1,72.875 188.3,73.475 v2(184.75,73.625)
VR1_2: C32.1 L3.1 VR1.2 | length 70.7
  Top Layer w0.9: VR1.2@53.56,98.135 53.65,100.075 54.075,100.4 C32.1@57.487,100.424 57.75,107.025 85.6,117.175 101.375,117.1 102.05,116.45 L3.1@101.962,104.609
VR1_3: C34.2 P21.3 VR1.3 | length 15.8
  Top Layer w0.6: C34.2@49.07,96.6 VR1.3@51.06,96.634 63.025,96.575 P21.3@63.817,94.863
VREF: C22.2 C23.2 R119.1 U1.21 | length 22
  Top Layer w0.3: R119.1@116.756,72.115 C22.2@118.875,72.145 C23.2@120.981,72.19 ; C23.2@120.981,72.19 122.675,72.2 122.875,72.5 122.95,76.7 123.3,77.1 129.2,77.225 129.6,77.625 U1.21@134.125,77.625
pads on no net: P1.0 P2.7 P2.8 P3.3 P3.4 P4.3 P4.4 P6.5 P6.6 P9.7 P9.8 P10.3 P10.4 P11.3 P11.4 P12.3 P12.4 U5.10 U5.11 U5.12 U5.13

## Polygon pours and split planes (outlines as drawn)
GND on Bottom Layer (solid): 38.45,101.05 84.525,120.65 146.4,120.1 169.55,111 192.1,100.325 191.925,39.35 38.975,38.1 38.45,101.05
LS-VCC5V-R on Top Layer (solid): 92.675,80.725 92.675,75.6 107.85,75.75 107.75,80.8 92.775,80.725 92.675,80.725 92.725,80.625
GND on Top Layer (solid): 92.775,75.325 107.825,75.325 107.675,70.875 92.75,70.875 92.7,70.925 92.675,71.475 92.775,75.325
U4_11 on Top Layer (solid): 68.9,96.875 68.9,91.275 73.85,91.275 73.8,96.875 68.9,96.875 68.875,96.9
GND on Top Layer (solid): 191.15,102.525 191.7,38.55 127.325,38.375 38.1,38.95 38.85,101.2 61.25,111.675 84.3,120.625 84.275,120.625 85.4,121.1 145.825,121.35 191.15,102.525

## Keep-outs
Keep-Out Layer:
  lines w0.254: 40.217,99.423 cw(c128.81,-47.614) 85.217,118.423 ; 145.218,118.422 cw(c100.226,-51.397) 190.2,99.493

## Silkscreen, mask and mechanical layers (free items; w line width, h text height)
Top Overlay:
  lines w0.254: 71.967,57.579 76.117,57.579 ; 73.967,55.148 73.967,60.248 ; 76.517,79.448 79.767,79.448 ; 78.067,78.548 78.067,80.348 ; 154.367,57.648 158.467,57.648 ; 156.367,55.248 156.367,60.048
  text "CL" at 161.217,97.223 h0.8 r90
  text "IO" at 161.267,94.548 h0.8 r90
  text "-" at 160.917,92.773 h0.8 r180
  text "+" at 160.434,90.031 h0.8 r225
  text "group 6" at 111.746,41.087 h2.03 r4
Mechanical 1:
  lines w0.254: 40.242,40.423 40.242,99.423 cw(c128.835,-47.614) 85.242,118.423 145.242,118.423 ; 145.242,118.423 cw(c100.251,-51.397) 190.224,99.493 ; 170.367,57.948 170.467,57.848 ; 190.242,40.423 190.242,99.523 ; 190.249,99.518 ccw(c100.276,-51.372) 145.267,118.448 85.267,118.448 ccw(c128.86,-47.589) 40.267,99.448 40.267,40.448 190.267,40.448 190.267,99.548
Document:
  lines w0.254: 40.139,40.448 40.139,99.448 cw(c40.267,99.448) 40.201,99.557 cw(c128.86,-47.589) 85.235,118.571 cw(c85.267,118.448) 85.267,118.575 145.267,118.575 cw(c145.267,118.448) 145.299,118.571 cw(c100.276,-51.372) 190.239,99.672 cw(c190.267,99.548) 190.394,99.548 190.394,40.448 cw(c190.267,40.448) 190.267,40.32 40.267,40.32 cw(c40.267,40.448) 40.139,40.448